# Altium PCB LEDMATRIX.PcbDoc
Units mm, origin at the board's own origin, x right, y up, seen from the top; angles counter-clockwise.
Board outline 143.26 x 36.32 mm, 2 copper layers (Top Layer, Bottom Layer); 27 components, 78 nets, 240 pads, 74 vias.
Unrouted connection lines stored in the file: 3.
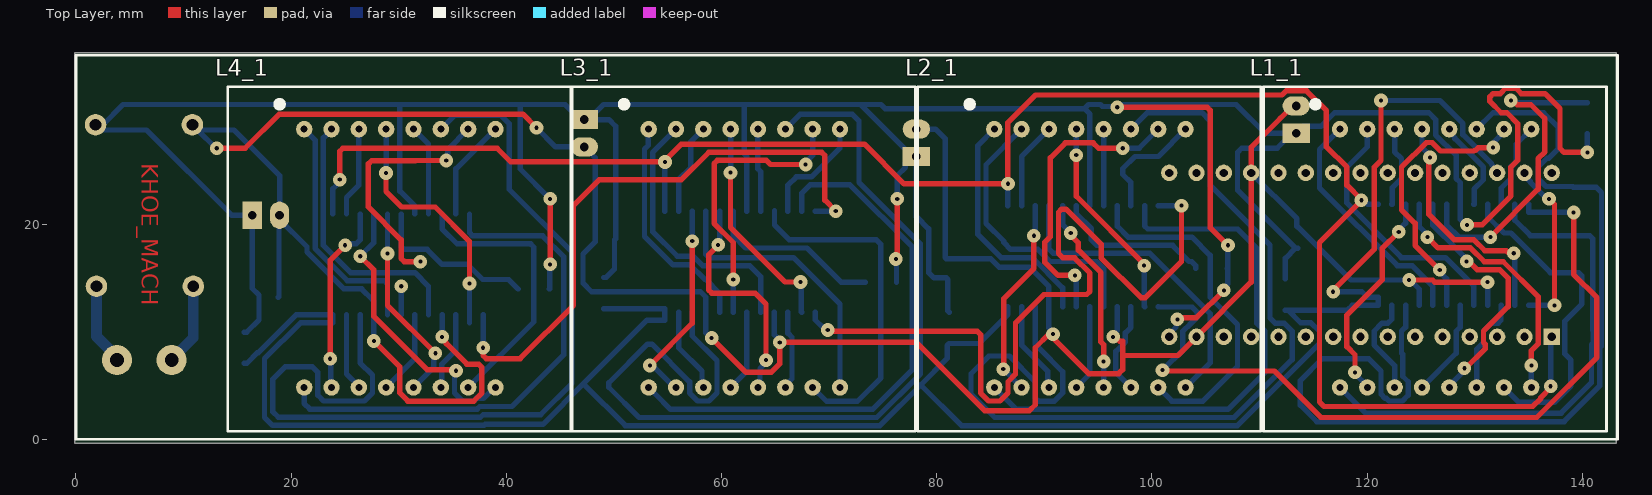
[diagram p0: Top Layer view]
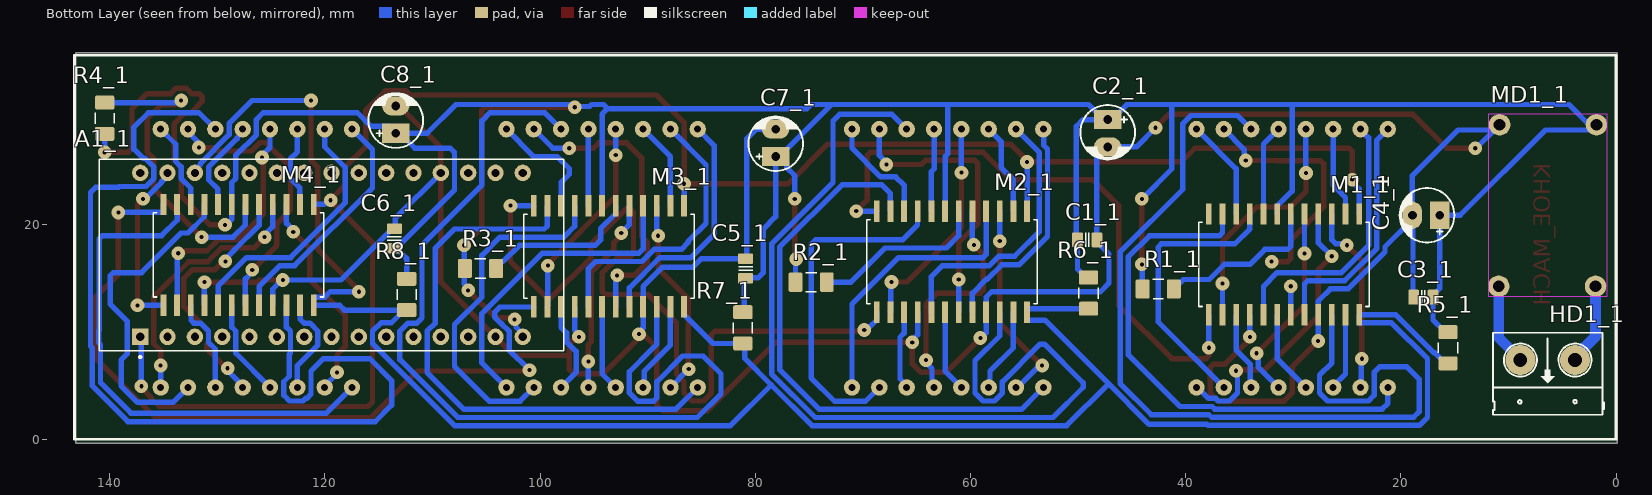
[diagram p1: Bottom Layer view, seen from below]

## Layer stack, top to bottom
Top Solder: solder mask 0.0102, Solder Resist, Dk 3.5
Top Layer: signal copper 0.0356
Dielectric 1: dielectric 0.32, FR-4, Dk 4.8
Bottom Layer: signal copper 0.0356
Bottom Solder: solder mask 0.0102, Solder Resist, Dk 3.5

## Board outline
-0.127,-0.381 143.129,-0.381 143.129,35.941 -0.127,35.941

## Design rules (kind name [scope] priority, off if disabled: settings)
Clearance [All] p1: gap=0.254 ignorepadtopadclearanceinfootprint=FALSE except(0.508: Arc-Fill Arc-Poly Arc-Region Track-Fill Track-Poly Track-Region SMDPad-Fill SMDPad-Poly SMDPad-Region THPad-Fill THPad-Poly THPad-Region Via-Fill Via-Poly Via-Region Fill-Fill Fill-Poly Fill-Region Poly-Poly Poly-Region Region-Region)
HoleSize [All] p1: absolutevalues=TRUE maxlimit=3 minlimit=0.15 maxpercent=80.000 minpercent=20.000
PolygonConnect [All] p1: connectstyle=Relief reliefconductorwidth=0.254 reliefentries=4 polygonreliefangle="90 Angle" airgapwidth=0.254
RoutingVias [All] p1: holewidth=0 width=1.27 viastyle="Through Hole" minholewidth=0 minwidth=1.27 maxholewidth=0 maxwidth=1.27
SolderMaskExpansion [All] p1: expansion=0.102 istentingtop=FALSE
Width [All] p1: maxlimit=1 minlimit=0.254 preferedwidth=0.5
29 further rules are at their usual default settings.

## Components (designator, comment, footprint, x,y, rotation, side; value= is the part's Value field where it differs from the comment)
A1_1 "ARDUINO-NANO" ARDUINO-NANO 119.634,16.764 r180 bottom (schematic designator A1)
C1_1 "approved sub OK" CAPC2012X135N 49.149,18.542 r180 bottom value=0.1uF (schematic designator C1)
C2_1 "10uF" CP1/2 47.244,29.718 r270 bottom (schematic designator C2)
C3_1 "approved sub OK" CAPC2012X135N 17.907,13.208 r0 bottom value=0.1uF (schematic designator C3)
C4_1 "10uF" CP1/2 16.383,20.828 r0 bottom (schematic designator C4)
C5_1 "approved sub OK" CAPC2012X135N 80.899,15.875 r90 bottom value=0.1uF (schematic designator C5)
C6_1 "approved sub OK" CAPC2012X135N 113.538,18.669 r90 bottom value=0.1uF (schematic designator C6)
C7_1 "10uF" CP1/2 78.105,26.289 r90 bottom (schematic designator C7)
C8_1 "10uF" CP1/2 113.411,28.448 r90 bottom (schematic designator C8)
HD1_1 "Header 2" HED2 3.81,7.366 r0 bottom (schematic designator HD1)
L1_1 "LEDMATRIX-8X8" LEDMATRIX_8X8 125.857,17.018 r0 top (schematic designator L1)
L2_1 "LEDMATRIX-8X8" LEDMATRIX_8X8 93.726,17.018 r0 top (schematic designator L2)
L3_1 "LEDMATRIX-8X8" LEDMATRIX_8X8 61.608,17.018 r0 top (schematic designator L3)
L4_1 "LEDMATRIX-8X8" LEDMATRIX_8X8 29.591,17.018 r0 top (schematic designator L4)
M1_1 "MAX7219" MAX7219 30.861,16.383 r90 bottom (schematic designator M1)
M2_1 "MAX7219" MAX7219 61.722,16.637 r90 bottom (schematic designator M2)
M3_1 "MAX7219" MAX7219 93.599,17.145 r90 bottom (schematic designator M3)
M4_1 "MAX7219" MAX7219 128.016,17.272 r90 bottom (schematic designator M4)
MD1_1 "module- mini360" MODULE-MINI360 6.35,21.717 r90 bottom (schematic designator MD1)
R1_1 "Thick Film" RESC3216N_ZERO 42.545,13.97 r0 bottom value=27K (schematic designator R1)
R2_1 "Thick Film" RESC3216N_ZERO 74.803,14.605 r0 bottom value=27K (schematic designator R2)
R3_1 "Thick Film" RESC3216N_ZERO 105.537,15.875 r0 bottom value=27K (schematic designator R3)
R4_1 "Thick Film" RESC3216N_ZERO 140.462,29.845 r270 bottom value=27K (schematic designator R4)
R5_1 "Thick Film" RESC3216N_ZERO 15.621,8.509 r90 bottom value=10K (schematic designator R5)
R6_1 "Thick Film" RESC3216N_ZERO 49.022,13.589 r90 bottom value=10K (schematic designator R6)
R7_1 "Thick Film" RESC3216N_ZERO 81.153,10.361 r90 bottom value=10K (schematic designator R7)
R8_1 "Thick Film" RESC3216N_ZERO 112.395,13.462 r90 bottom value=10K (schematic designator R8)

## Footprints (in the part's own frame and the unit in brackets; to place one, negate y for a bottom-side part, rotate by r counter-clockwise, add the part's x,y. Pads: shape width x height; smd on the part's side, far side on the other; paste and mask are expansions set on the pad)
ARDUINO-NANO [mil]
  rect 60x60 / inner round 60 / far side rect 60x60 hole 30: 1(-690,-285)
  round 60 hole 30: 2(-590,-285) 3(-490,-285) 4(-390,-285) 5(-290,-285) 6(-190,-285) 7(-90,-285) 8(10,-285) 9(110,-285) 10(210,-285) 11(310,-285) 12(410,-285) 13(510,-285) 14(610,-285) 15(710,-285) 16(710,315) 17(610,315) 18(510,315) 19(410,315) 20(310,315) 21(210,315) 22(110,315) 23(10,315) 24(-90,315) 25(-190,315) 26(-290,315) 27(-390,315) 28(-490,315) 29(-590,315) 30(-690,315)
  silkscreen extent -840,-363 860,365, body extent -885,-335 860,365, height 236
CAPC2012X135N [mm] "Chip Capacitor, Body 2.0x1.2mm, EIA 0805, IPC Medium Density"
  round 0.254 on Mech15: 0(0,0)
  rrect25% 1x1.4 smd: 1(-0.9,0) 2(0.9,0)
  Top Layer pour cut-out: -0.675,0.7 -0.475,0.9 0.475,0.9 0.675,0.7 0.675,-0.7 0.475,-0.9 -0.475,-0.9 -0.675,-0.7
  silkscreen extent -0.15,-0.65 0.15,0.65, body extent -1.1,-0.72 1.1,0.73, height 1.34
CP1/2 [mil]
  rect 70x100 hole 32: 1(0,0)
  oval 70x100 hole 32: 2(100,0)
  silkscreen extent -53,-100 146,100, body extent -54,-99 144,100, height 296
HED2 [mil] "Header 2, 2 pin, hight 300mil, Pin to Pin 200, Colour Green"
  round 110 hole 50: 1(0,0) 2(200,0)
  silkscreen extent -106,-100 300,200, body extent -92,-90 302,205, height 394
LEDMATRIX_8X8 [mil] "3mm"
  round 60 hole 25.59: C1(-30,464.88) C2(-130,-480) C3(-30,-480) C4(270,464.88) C5(170,-480) C6(170,464.88) C7(-230,464.88) C8(-330,464.88) R1(370,464.88) R2(-130,464.88) R3(370,-480) R4(70,464.88) R5(-330,-480) R6(270,-480) R7(-230,-480) R8(70,-480)
  silkscreen extent -610,-640 645,620, body extent -610,-639 650,621, height 239
MAX7219 [mil]
  rect 78x21 smd: 1(-189.5,275) 2(-189.5,225) 3(-189.5,175) 4(-189.5,125) 5(-189.5,75) 6(-189.5,25) 7(-189.5,-25) 8(-189.5,-75) 9(-189.5,-125) 10(-189.5,-175) 11(-189.5,-225) 12(-189.5,-275) 13(179.5,-275) 14(179.5,-225) 15(179.5,-175) 16(179.5,-125) 17(179.5,-75) 18(179.5,-25) 19(179.5,25) 20(179.5,75) 21(179.5,125) 22(179.5,175) 23(179.5,225) 24(179.5,275)
  silkscreen extent -159,-312 149,312, body extent -208,-303 198,303, height 104
MODULE-MINI360 [mm]
  round 2 hole 1.1 mask+0: 1(7.52,4.466) 2(7.52,-4.534) 3(-7.493,4.555) 4(-7.493,-4.445)
  Top Layer keep-out region: -8.47,5.497 8.53,5.497 8.53,-5.503 -8.47,-5.503
RESC3216N_ZERO [mm] "Chip Resistor, Body 3.2x1.6mm, 1206, IPC Medium Density"
  round 0.508 on Mech15: 0(0,0)
  rrect25% 1.3x1.8 smd: 1(-1.45,0) 2(1.45,0)
  silkscreen extent -0.51,-0.89 0.51,0.89, body extent -1.62,-0.82 1.63,0.83, height 0.69

## Part data
C1_1 C3_1 C5_1 C6_1: library part "CAP C_0805", "Capacitor SMD Cer 1.8nF 10% 50V X7R 0805", Manufacturer 1="AVX Corporation", Manufacturer Part Number 1=08055C182KAT2A, Operating Temperature="-55°C ~ 125°C", Package / Case="0805 (2012 metric)", Ratings="50V; X7R", Supplier Part Number 1=478-1374-1-ND, Tolerance=±10%, SCDType=source*, Supplier 1=Digi-Key
C2_1 C4_1 C7_1 C8_1: library part "CAP hoa", "Cap"
HD1_1: "Header 2 (Green)"
R1_1 R2_1 R3_1 R4_1 R5_1 R6_1 R7_1 R8_1: library part RES_1206, "Resistor SMD chip 0.0 Ohm 0.25W 1206", Manufacturer 1=Vishay/Dale, Manufacturer Part Number 1=CRCW12060000Z0EA, Package / Case="1206 (3216 metric)", Ratings=1/4W, Supplier Part Number 1=541-0.0ECT-ND, Tolerance=±5%, SCDType=spec*\?, Supplier 1=Digi-Key

## Via types
v1: diameter 1.27, hole 0.381, Top Layer to Bottom Layer, 74 vias

## Nets (pads, with @x,y where several pads share a name; then routed paths per layer and width w, separated by ;. In a path a pad name is that pad's centre, name@x,y a point inside that pad or via, vN(x,y) a via of type N, cw(c..) or ccw(c..) an arc to the next point about the centre after c; other vN are vias at no path point)
5V: 
A1: 
A2: 
A3: 
A4: 
B1: 
B2: 
B3: 
B4: 
C1: 
C2: 
C3: 
C4: 
CLK: 
D1: 
D2: 
D3: 
D4: 
DIG01: 
DIG02: 
DIG03: 
DIG04: 
DIG11: 
DIG12: 
DIG13: 
DIG14: 
DIG21: 
DIG22: 
DIG23: 
DIG24: 
DIG31: 
DIG32: 
DIG33: 
DIG34: 
DIG41: 
DIG42: 
DIG43: 
DIG44: 
DIG51: 
DIG52: 
DIG53: 
DIG54: 
DIG61: 
DIG62: 
DIG63: 
DIG64: 
DIG71: 
DIG72: 
DIG73: 
DIG74: 
DIN1: 
DIN2: 
DIN3: 
DIN4: 
DP1: 
DP2: 
DP3: 
DP4: 
E1: 
E2: 
E3: 
E4: 
F1: 
F2: 
F3: 
F4: 
G1: 
G2: 
G3: 
G4: 
GND: 
LOAD: 
NetHD1_1: 
NetHD1_2: 
NetM1_18: 
NetM2_18: 
NetM3_18: 
NetM4_18: 
pads on no net: A1_1.1 A1_1.2 A1_1.3 A1_1.4 A1_1.5 A1_1.6 A1_1.7 A1_1.8 A1_1.9 A1_1.10 A1_1.11 A1_1.12 A1_1.13 A1_1.14 A1_1.15 A1_1.16 A1_1.17 A1_1.18 A1_1.19 A1_1.20 A1_1.21 A1_1.22 A1_1.23 A1_1.24 A1_1.25 A1_1.26 A1_1.27 A1_1.28 A1_1.29 A1_1.30 C1_1.0 C1_1.1 C1_1.2 C2_1.1 C2_1.2 C3_1.0 C3_1.1 C3_1.2 C4_1.1 C4_1.2 C5_1.0 C5_1.1 C5_1.2 C6_1.0 C6_1.1 C6_1.2 C7_1.1 C7_1.2 C8_1.1 C8_1.2 HD1_1.1 HD1_1.2 L1_1.C1 L1_1.C2 L1_1.C3 L1_1.C4 L1_1.C5 L1_1.C6 L1_1.C7 L1_1.C8 L1_1.R1 L1_1.R2 L1_1.R3 L1_1.R4 L1_1.R5 L1_1.R6 L1_1.R7 L1_1.R8 L2_1.C1 L2_1.C2 L2_1.C3 L2_1.C4 L2_1.C5 L2_1.C6 L2_1.C7 L2_1.C8 L2_1.R1 L2_1.R2 L2_1.R3 L2_1.R4 L2_1.R5 L2_1.R6 L2_1.R7 L2_1.R8 L3_1.C1 L3_1.C2 L3_1.C3 L3_1.C4 L3_1.C5 L3_1.C6 L3_1.C7 L3_1.C8 L3_1.R1 L3_1.R2 L3_1.R3 L3_1.R4 L3_1.R5 L3_1.R6 L3_1.R7 L3_1.R8 L4_1.C1 L4_1.C2 L4_1.C3 L4_1.C4 L4_1.C5 L4_1.C6 L4_1.C7 L4_1.C8 L4_1.R1 L4_1.R2 L4_1.R3 L4_1.R4 L4_1.R5 L4_1.R6 L4_1.R7 L4_1.R8 M1_1.1 M1_1.2 M1_1.3 M1_1.4 M1_1.5 M1_1.6 M1_1.7 M1_1.8 M1_1.9 M1_1.10 M1_1.11 M1_1.12 M1_1.13 M1_1.14 M1_1.15 M1_1.16 M1_1.17 M1_1.18 M1_1.19 M1_1.20 M1_1.21 M1_1.22 M1_1.23 M1_1.24 M2_1.1 M2_1.2 M2_1.3 M2_1.4 M2_1.5 M2_1.6 M2_1.7 M2_1.8 M2_1.9 M2_1.10 M2_1.11 M2_1.12 M2_1.13 M2_1.14 M2_1.15 M2_1.16 M2_1.17 M2_1.18 M2_1.19 M2_1.20 M2_1.21 M2_1.22 M2_1.23 M2_1.24 M3_1.1 M3_1.2 M3_1.3 M3_1.4 M3_1.5 M3_1.6 M3_1.7 M3_1.8 M3_1.9 M3_1.10 M3_1.11 M3_1.12 M3_1.13 M3_1.14 M3_1.15 M3_1.16 M3_1.17 M3_1.18 M3_1.19 M3_1.20 M3_1.21 M3_1.22 M3_1.23 M3_1.24 M4_1.1 M4_1.2 M4_1.3 M4_1.4 M4_1.5 M4_1.6 M4_1.7 M4_1.8 M4_1.9 M4_1.10 M4_1.11 M4_1.12 M4_1.13 M4_1.14 M4_1.15 M4_1.16 M4_1.17 M4_1.18 M4_1.19 M4_1.20 M4_1.21 M4_1.22 M4_1.23 M4_1.24 MD1_1.1 MD1_1.2 MD1_1.3 MD1_1.4 R1_1.0 R1_1.1 R1_1.2 R2_1.0 R2_1.1 R2_1.2 R3_1.0 R3_1.1 R3_1.2 R4_1.0 R4_1.1 R4_1.2 R5_1.0 R5_1.1 R5_1.2 R6_1.0 R6_1.1 R6_1.2 R7_1.0 R7_1.1 R7_1.2 R8_1.0 R8_1.1 R8_1.2
copper on no net: | length 2876.9
  Top Layer w0.254: 10.816,28.935 10.816,29.237
  Top Layer w0.5: v1(13.081,27.051) 15.725,27.051 18.9,30.226 41.529,30.226 v1(42.799,28.956) ; v1(23.622,7.493) 23.622,16.637 v1(25.019,18.034) ; v1(24.511,24.13) 24.511,26.758 24.804,27.051 39.135,27.051 40.405,25.781 v1(54.737,25.781) 54.737,25.908 56.261,27.432 73.279,27.432 76.962,23.749 v1(86.614,23.749) 86.614,29.425 89.193,32.004 112.076,32.004 112.453,32.381 114.369,32.381 116.209,30.541 116.209,27.186 118.106,25.289 118.106,23.626 119.465,22.267 v1(119.465,22.219) 119.465,22.183 115.574,18.292 115.574,3.464 115.99,3.048 135.382,3.048 136.144,3.81 136.144,3.883 137.053,4.793 v1(137.053,4.933) ; v1(26.417,17.015) 27.686,15.747 27.686,11.43 32.639,6.477 35.219,6.477 v1(35.326,6.37) ; v1(27.686,9.144) 30.095,6.735 30.095,4.31 30.849,3.556 36.969,3.556 37.719,4.306 37.719,6.692 37.426,6.985 36.322,6.985 34.417,8.89 34.417,8.936 34.036,9.317 v1(34.036,9.525) ; v1(28.816,24.752) 28.816,23.042 30.267,21.59 ; v1(28.956,17.272) 28.956,12.446 v1(33.401,8.001) ; v1(30.226,14.224) v1@30.267,14.265 ; 30.278,21.59 33.389,21.59 36.576,18.403 v1(36.576,14.478) ; v1(32.005,16.513) 32.003,16.51 30.519,16.51 30.226,16.803 30.226,18.542 27.178,21.59 27.178,25.598 27.471,25.891 31.52,25.891 31.541,25.912 v1(34.417,25.912) ; v1(37.846,8.509) 37.846,7.786 38.139,7.493 41.275,7.493 46.228,12.446 46.228,21.717 48.641,24.13 56.261,24.13 58.809,26.678 69.303,26.678 69.596,26.385 69.596,22.225 v1(70.612,21.209) ; v1(44.069,16.256) v1(44.069,22.352) ; v1(53.34,6.858) 57.277,10.795 v1(57.277,18.415) ; v1(59.08,9.423) 62.279,6.223 64.607,6.223 65.405,7.021 v1(65.405,9.017) 78.105,9.017 84.455,2.667 88.607,2.667 89.154,3.214 89.154,8.509 90.424,9.779 v1@90.613,9.59 ; v1(59.686,18.078) 59.686,18.03 58.801,17.145 58.801,13.882 59.094,13.589 63.119,13.589 64.135,12.573 v1(64.135,7.362) ; v1(60.833,24.785) 60.833,19.685 65.893,14.625 v1(67.33,14.625) ; v1(61.087,14.859) 61.087,18.288 59.309,20.066 59.309,25.631 59.602,25.924 64.167,25.924 64.552,25.539 v1(67.818,25.539) ; v1(69.867,10.156) 69.99,10.033 83.785,10.033 84.078,9.74 84.078,4.302 84.82,3.56 85.868,3.56 86.618,4.31 86.618,5.35 87.322,6.055 87.322,10.83 89.955,13.462 93.941,13.462 94.234,13.755 94.234,15.444 92.815,16.863 91.714,16.863 91.309,17.268 91.309,21.102 91.602,21.395 92.016,21.395 95.273,18.138 95.273,16.868 98.98,13.161 99.394,13.161 102.743,16.51 v1(102.743,21.717) ; v1(76.2,16.764) 76.327,16.891 v1(76.327,22.352) ; v1(86.183,6.527) 86.233,6.576 86.233,13.081 89.027,15.875 v1(89.027,18.923) ; v1(90.801,9.779) v1@90.612,9.59 ; v1(92.448,19.181) 92.448,18.973 93.162,18.259 93.162,17.582 95.254,15.49 95.254,9.053 95.504,8.803 v1(95.504,7.239) ; v1(92.829,15.238) 91.264,15.238 90.051,16.452 90.051,18.336 90.555,18.84 90.555,26.166 91.944,27.555 94.531,27.555 95.035,27.051 v1(97.282,27.051) ; v1(92.964,26.416) 92.964,22.606 99.271,16.299 v1(99.271,16.141) ; v1(96.393,9.525) 96.601,9.525 97.021,9.105 97.282,9.105 97.282,7.791 ; v1(96.774,30.865) 105.121,30.865 105.414,30.572 105.414,19.681 v1(107.061,18.034) ; v1(100.984,6.428) 101.062,6.35 111.379,6.35 115.697,2.032 135.763,2.032 141.351,7.62 141.351,13.167 139.192,15.326 v1(139.192,21.082) ; v1(102.362,11.155) 102.509,11.302 v1@102.742,11.302 ; v1@102.743,11.303 104.14,11.303 v1(106.68,13.843) ; 113.411,30.988 113.096,30.988 111.949,29.841 111.932,29.841 109.22,27.129 109.22,14.605 104.14,9.525 102.406,7.791 97.282,7.791 ; v1(116.836,13.716) 116.836,13.839 120.646,17.649 120.646,25.281 121.285,25.92 v1(121.285,31.492) ; v1(118.872,6.223) 118.872,7.861 118.114,8.619 118.114,11.539 121.4,14.825 121.4,17.745 v1(122.936,19.281) ; v1(123.896,14.803) 126.084,14.803 126.282,14.605 v1(131.191,14.605) ; v1(125.599,18.794) 126.605,17.788 129.609,17.788 130.895,16.502 132.646,16.502 135.886,13.262 135.886,8.873 135.256,8.243 v1(135.255,6.858) ; v1(125.833,26.186) 125.734,26.088 125.734,20.911 128.103,18.542 129.921,18.542 130.937,17.526 132.946,17.526 133.033,17.439 133.477,17.439 v1(133.624,17.292) ; v1(126.746,15.752) 126.742,15.752 124.46,18.034 124.46,20.066 123.194,21.332 123.194,25.289 125.495,27.59 126.04,27.59 126.833,26.797 129.903,26.797 129.945,26.839 130.068,26.839 130.318,27.089 131.674,27.089 v1(131.703,27.118) ; v1(129.036,6.604) 129.159,6.604 130.978,8.423 130.978,8.837 130.814,9.001 130.814,10.049 133.096,12.331 133.096,14.986 132.334,15.748 130.246,15.748 129.457,16.538 v1(129.248,16.538) ; v1(129.286,19.935) 130.679,19.935 133.354,22.61 133.354,25.289 133.981,25.916 133.981,29.35 132.978,30.353 132.461,30.353 131.398,31.416 131.398,31.83 131.699,32.131 132.378,32.131 132.878,32.631 133.822,32.631 134.322,32.131 136.525,32.131 137.922,30.734 137.922,27.051 138.303,26.67 v1(140.462,26.67) ; v1(131.445,18.796) 135.894,23.245 135.894,26.088 136.521,26.715 136.521,29.799 136.228,30.092 135.225,31.095 133.955,31.095 133.558,31.492 v1(133.35,31.492) ; v1(136.906,22.352) 137.414,21.844 v1(137.414,12.446) ; v1@90.613,9.59 94.103,6.1 96.905,6.1 97.282,6.477 97.282,7.791
  Bottom Layer w0.5: 10.816,29.237 11.306,28.748 ; v1(13.081,27.051) 13.003,27.051 11.306,28.748 ; 15.621,7.059 15.871,7.059 16.863,8.051 16.947,8.051 20.466,11.57 23.876,11.57 23.876,10.846 23.859,10.829 20.862,10.829 17.526,7.493 17.526,2.032 18.26,1.298 37.91,1.298 38.009,1.397 43.384,1.397 47.219,5.232 ; 15.621,9.959 15.871,9.959 17.007,11.095 17.007,13.208 17.007,13.408 16.383,14.032 16.383,20.828 14.478,20.828 6.558,28.748 2.306,28.748 1.816,29.237 2.509,29.237 4.387,31.115 30.099,31.115 ; 18.807,13.208 18.865,13.266 18.865,20.77 18.923,20.828 18.923,24.511 14.686,28.748 11.306,28.748 ; 18.923,20.447 21.471,17.899 21.471,17.417 24.902,13.986 26.543,13.986 27.559,12.97 27.559,12.954 27.669,12.844 27.669,11.586 27.686,11.57 v1(27.686,9.144) ; 21.209,4.826 21.209,3.341 21.744,2.806 37.286,2.806 37.528,3.048 40.513,3.048 45.339,7.874 45.339,16.953 43.377,18.915 36.869,18.915 36.576,19.208 36.576,20.942 ; 21.209,28.826 22.225,27.81 22.225,17.73 25.215,14.74 28.663,14.74 28.956,14.447 28.956,11.57 ; 23.553,5.022 23.749,4.826 23.685,4.889 23.685,7.429 v1(23.622,7.493) ; 23.749,28.826 23.749,28.783 22.987,28.021 22.987,18.034 25.527,15.494 31.496,15.494 32.766,14.224 32.766,11.57 ; 23.876,20.942 23.876,23.287 24.511,23.922 v1(24.511,24.13) ; v1(25.019,18.034) 25.166,18.181 26.055,18.181 26.416,18.542 26.416,20.942 ; 25.146,11.57 25.146,6.075 26.289,4.932 26.289,4.826 ; 25.146,20.942 25.146,22.479 26.289,23.622 26.289,28.826 ; 26.416,11.57 26.416,7.104 27.555,5.965 27.555,4.302 26.813,3.56 23.014,3.56 22.479,4.095 22.479,6.223 21.963,6.739 19.439,6.739 18.28,5.58 18.28,2.579 18.807,2.052 37.598,2.052 37.832,2.286 43.18,2.286 46.093,5.199 46.093,17.407 40.259,23.241 40.259,29.337 40.255,29.341 40.255,29.35 39.513,30.092 35.175,30.092 33.909,28.826 ; v1(26.417,17.015) 27.686,18.284 27.686,20.942 ; v1(28.816,24.752) 28.829,24.765 28.829,26.387 28.829,28.826 ; 28.829,4.826 31.496,7.493 31.496,11.57 ; v1(28.956,17.272) 28.956,20.942 ; 30.226,11.57 v1(30.226,14.224) ; 30.226,20.942 30.226,17.946 30.519,17.653 32.639,17.653 34.036,16.256 36.409,16.256 37.806,14.859 40.206,14.859 41.095,13.97 ; 31.369,4.826 33.254,6.711 33.254,7.854 v1(33.401,8.001) ; 31.369,28.826 32.766,27.429 32.766,20.942 ; 31.496,20.942 31.496,21.666 30.099,23.063 30.099,31.115 ; 33.909,4.826 34.008,4.925 34.008,6.997 35.306,8.295 35.306,11.57 ; v1(34.036,9.525) 34.036,11.57 ; 34.036,20.942 34.036,19.558 35.433,18.161 42.252,18.161 42.545,17.868 42.545,10.922 36.449,4.826 ; v1(34.417,25.912) 34.564,26.059 34.564,26.941 36.449,28.826 ; 35.306,20.942 35.306,25.143 38.989,28.826 ; v1(35.326,6.37) 35.179,6.223 35.179,4.306 35.925,3.56 36.973,3.56 37.215,3.802 37.875,3.802 38.899,4.826 38.989,4.826 ; 36.576,10.846 36.576,11.57 v1(36.576,14.478) ; v1(37.846,8.509) 37.846,11.57 ; v1(42.799,28.956) 44.577,27.178 47.244,27.178 47.279,27.178 47.87,26.588 47.87,26.552 48.26,26.162 48.26,18.553 48.249,18.542 48.249,18.342 47.117,17.21 47.117,14.517 47.918,13.716 58.039,13.716 58.53,13.225 58.53,11.84 58.547,11.824 58.547,9.906 59.03,9.423 v1(59.08,9.423) ; 43.995,13.97 44.032,14.007 44.032,16.219 v1(44.069,16.256) ; v1(44.069,22.352) 41.275,25.146 41.275,31.115 ; 49.022,12.139 54.72,12.139 54.737,12.122 54.737,11.1 54.72,11.083 53.07,11.083 47.219,5.232 ; 49.022,15.039 49.272,15.039 50.049,15.816 50.049,18.542 50.165,18.658 50.165,29.083 49.53,29.718 47.625,29.718 ; 53.226,4.826 53.861,4.191 55.266,2.786 74.033,2.786 77.724,6.477 77.724,17.857 71.935,23.646 68.223,23.646 67.437,22.86 67.437,21.196 ; 53.226,28.826 53.187,28.788 53.187,27.314 52.84,26.967 52.84,18.865 55.49,16.214 57.091,16.214 58.416,14.889 58.492,14.889 59.817,13.564 59.817,11.824 ; v1(53.34,6.858) 53.487,6.711 53.741,6.711 55.626,4.826 55.766,4.826 ; 54.737,21.196 v1(54.737,25.781) ; 55.766,28.826 53.594,26.654 53.594,19.304 55.88,17.018 57.354,17.018 58.235,16.137 62.603,16.137 63.627,15.113 63.627,11.824 ; 56.007,11.824 56.007,8.509 58.178,6.338 58.178,4.954 58.306,4.826 ; 56.007,21.196 56.007,24.13 57.15,25.273 57.15,27.67 58.306,28.826 ; 57.277,11.824 57.277,9.614 59.572,7.32 59.572,4.302 58.83,3.56 57.781,3.56 57.04,4.302 57.04,5.342 53.528,8.854 53.114,8.854 49.515,5.255 49.515,4.841 52.324,2.032 74.422,2.032 78.478,6.088 78.478,18.169 72.771,23.876 72.771,29.591 72.136,30.226 67.326,30.226 65.926,28.826 ; v1(57.277,18.415) 57.277,21.196 ; 58.547,21.196 58.547,17.184 58.84,16.891 66.675,16.891 71.006,12.56 71.006,4.826 ; v1(59.686,18.078) 59.817,18.209 59.817,21.196 ; v1(60.833,24.785) 60.839,24.791 60.839,28.82 60.846,28.826 ; 60.846,4.826 62.357,6.337 62.357,11.824 ; 61.087,11.824 v1(61.087,14.859) ; 61.087,21.196 61.087,18.923 62.23,17.78 67.945,17.78 71.12,14.605 73.353,14.605 ; 62.357,21.196 62.357,26.289 62.103,26.543 62.103,28.293 62.112,28.302 62.112,29.35 62.103,29.359 62.103,31.115 ; 63.386,4.826 63.569,5.01 63.569,6.588 64.135,7.154 v1(64.135,7.362) ; 63.386,28.826 63.373,28.813 63.373,25.146 63.627,24.892 63.627,21.196 ; 64.897,11.824 64.897,9.733 65.405,9.225 v1(65.405,9.017) ; 64.921,21.241 64.921,19.915 66.302,18.534 74.391,18.534 74.803,18.122 74.803,5.715 72.628,3.54 69.752,3.54 68.466,4.826 ; 65.926,4.826 65.926,5.009 66.548,5.631 66.548,9.485 66.167,9.866 66.167,11.824 ; 66.167,21.196 66.167,23.622 66.945,24.4 68.342,24.4 71.006,27.064 71.006,28.826 ; v1(67.33,14.625) 67.42,14.535 67.42,11.84 67.437,11.824 ; v1(67.818,25.539) 67.818,25.747 68.466,26.395 68.466,28.826 ; 68.707,11.824 68.707,11.1 69.503,10.303 69.719,10.303 v1(69.867,10.156) ; 68.707,21.196 70.345,21.196 70.358,21.209 v1(70.612,21.209) ; v1(76.2,16.764) 76.2,16.256 76.253,16.203 76.253,14.605 ; v1(76.327,22.352) 76.327,24.511 77.085,25.269 77.085,25.65 77.724,26.289 ; 78.105,28.829 79.883,28.829 80.772,27.94 80.772,16.902 80.899,16.775 85.029,16.775 85.802,16.002 88.622,16.002 90.424,14.2 90.424,12.332 90.424,10.364 90.801,9.987 v1(90.801,9.779) ; 81.153,11.811 81.026,11.938 81.026,14.848 80.899,14.975 80.874,15 79.742,15 79.248,15.494 79.248,19.558 78.105,20.701 78.105,26.289 77.724,26.289 ; 85.344,4.826 87.392,2.778 107.053,2.778 110.486,6.211 110.486,10.049 109.732,10.803 109.732,17.78 107.962,19.55 99.607,19.55 99.314,19.843 99.314,21.704 ; 85.344,28.826 83.82,27.302 83.82,19.05 85.979,16.891 88.875,16.891 91.694,14.072 91.694,12.332 ; v1(86.183,6.527) 87.884,4.826 ; 86.614,12.332 86.614,11.608 83.917,8.911 81.153,8.911 80.967,8.725 80.967,7.511 78.511,5.055 ; 86.614,21.704 v1(86.614,23.749) ; 87.884,12.332 87.884,8.752 90.298,6.338 90.298,4.952 90.424,4.826 ; 87.884,21.704 87.884,26.289 90.421,28.826 90.424,28.826 ; 87.884,28.826 87.881,28.826 84.574,25.519 84.574,20.066 86.233,18.407 86.233,18.288 86.868,17.653 89.397,17.653 90.524,16.526 94.853,16.526 95.504,15.875 95.504,12.332 ; v1(89.027,18.923) 89.137,19.033 89.137,21.688 89.154,21.704 ; 89.154,12.332 89.154,8.826 89.579,8.401 91.698,6.283 91.698,4.31 90.944,3.556 89.447,3.556 89.154,3.849 89.154,5.346 86.753,7.747 84.836,7.747 83.185,6.096 83.185,4.23 85.391,2.024 107.638,2.024 113.026,7.412 113.026,10.049 112.284,10.791 111.448,10.791 110.967,11.272 110.967,18.065 105.41,23.622 105.41,29.591 104.64,30.361 99.579,30.361 98.044,28.826 ; 90.424,21.704 90.424,17.692 90.836,17.28 99.814,17.28 105.406,11.688 105.406,7.108 103.124,4.826 ; 91.694,21.704 91.694,19.964 92.448,19.21 v1(92.448,19.181) ; v1(92.829,15.238) 92.947,15.12 92.947,12.348 92.964,12.332 ; 92.964,4.826 94.234,6.096 94.234,12.332 ; 92.964,21.704 92.964,20.98 94.361,19.583 94.361,18.542 94.869,18.034 101.928,18.034 103.437,16.525 103.687,16.525 104.087,16.125 104.087,15.875 ; v1(92.964,26.416) 92.964,28.826 ; 94.234,21.704 94.234,30.226 93.726,30.734 ; 95.504,4.826 v1(95.504,7.239) ; 95.504,21.704 95.504,28.826 ; v1(96.393,9.525) 96.393,9.733 96.774,10.114 96.774,12.332 ; 96.774,21.704 96.774,19.812 97.79,18.796 103.715,18.796 105.406,17.105 105.406,13.205 107.946,10.665 107.946,6.766 104.736,3.556 101.854,3.556 100.584,4.826 ; v1(96.774,30.865) 96.702,30.937 95.389,30.937 95.211,31.115 94.107,31.115 93.726,30.734 ; v1@96.774,31.115 107.823,31.115 110.49,28.448 113.03,28.448 ; v1(97.282,27.051) 98.809,27.051 100.584,28.826 ; 98.044,4.826 96.647,6.223 96.647,8.168 97.532,9.053 97.532,9.902 98.044,10.414 98.044,12.332 ; 98.044,21.704 98.044,23.876 97.282,24.638 97.282,25.146 98.425,26.289 100.587,26.289 103.124,28.826 ; v1(99.271,16.141) 99.297,16.114 99.297,12.348 99.314,12.332 ; 100.584,12.332 100.584,12.311 100.601,12.294 103.734,12.294 104.225,11.802 104.225,11.388 103.575,10.738 103.562,10.738 102.874,10.049 102.874,9.406 102.866,9.398 102.866,8.309 v1(100.984,6.428) ; 100.584,21.704 102.222,21.704 102.235,21.717 v1(102.743,21.717) ; 101.6,9.525 101.6,9.802 102.215,10.417 ; v1(106.68,13.843) 106.68,14.051 107.061,14.432 107.061,15.801 106.987,15.875 107.061,15.949 v1(107.061,18.034) ; 109.22,24.765 113.459,20.526 113.459,19.819 113.509,19.769 113.538,19.769 118.504,14.803 v1(123.896,14.803) 124.008,14.803 124.841,13.97 124.841,12.459 ; 112.395,14.912 112.395,16.826 113.338,17.769 ; 113.538,17.769 113.338,17.769 ; v1(116.836,13.716) 119.507,13.716 120.024,13.199 121.014,13.199 121.031,13.183 121.031,12.459 118.631,12.459 118.184,12.012 112.395,12.012 112.645,12.012 113.826,10.831 114.785,10.831 115.566,10.049 115.566,8.886 107.95,1.27 82.296,1.27 78.511,5.055 ; 117.475,4.826 119.863,2.438 138.024,2.438 140.851,5.265 140.851,8.796 141.029,8.974 141.029,10.076 140.97,10.135 140.97,18.63 140.677,18.923 135.169,18.923 133.731,20.361 133.731,21.831 ; 117.475,28.826 115.574,26.925 115.574,23.364 122.801,16.137 124.173,16.137 126.111,14.199 126.111,12.459 ; v1(118.872,6.223) 118.872,6.096 120.015,4.953 120.015,4.826 ; v1(119.465,22.219) 119.673,22.219 120.061,21.831 121.031,21.831 ; 120.015,28.826 120.015,27.19 118.11,25.285 118.11,21.963 123.182,16.891 127.284,16.891 129.921,14.254 129.921,12.459 ; v1(121.285,31.492) 126.759,31.492 128.901,29.35 128.901,28.31 131.56,25.651 131.56,25.562 132.08,25.042 132.08,24.765 ; 122.301,12.459 122.284,12.442 122.284,11.155 121.92,10.791 121.396,10.791 120.65,10.045 120.65,8.763 122.555,6.858 122.555,4.826 ; 122.301,21.831 122.318,21.848 122.318,23.372 123.186,24.241 123.186,26.079 122.555,26.71 122.555,28.826 ; v1(122.936,19.281) 122.936,19.456 123.571,20.091 123.571,21.831 ; 123.571,12.459 123.571,10.426 123.194,10.049 123.194,8.013 123.309,7.898 123.309,5.862 123.821,5.35 123.821,4.103 123.278,3.56 122.031,3.56 121.781,3.81 121.666,3.81 121.281,4.195 121.281,6.354 120.142,7.493 115.824,7.493 113.792,5.461 113.792,3.175 115.316,1.651 138.303,1.651 141.605,4.953 141.605,8.483 141.783,8.662 141.783,22.936 141.283,23.436 139.149,23.436 139.09,23.495 136.64,23.495 135.894,24.241 135.894,25.289 136.737,26.132 136.902,26.132 137.744,26.975 137.744,29.007 136.398,30.353 131.702,30.353 130.175,28.826 ; 124.841,21.831 124.841,19.76 125.599,19.002 v1(125.599,18.794) ; 125.095,4.826 128.27,8.001 128.27,10.045 128.651,10.426 128.651,12.459 ; 125.095,28.826 125.095,27.132 125.833,26.395 v1(125.833,26.186) ; 126.111,21.831 126.111,19.892 128.372,17.631 128.424,17.631 128.424,17.57 129.248,16.746 v1(129.248,16.538) ; v1(126.746,15.752) 126.746,15.544 127.381,14.909 127.381,12.459 ; 127.381,21.831 127.398,21.815 127.398,19.922 128.524,18.796 v1(131.445,18.796) ; 127.635,4.826 127.635,5.015 129.036,6.416 v1(129.036,6.604) ; 127.635,28.826 127.635,28.549 128.155,28.029 128.155,27.94 130.806,25.289 130.806,24.126 129.938,23.258 129.938,21.848 129.921,21.831 ; v1(129.286,19.935) 129.163,19.935 128.651,20.447 128.651,21.831 128.651,23.864 128.266,24.249 128.266,26.405 126.369,28.302 126.369,29.714 125.73,30.353 116.967,30.353 115.701,29.087 114.05,29.087 113.411,28.448 113.03,28.448 ; 130.175,4.826 130.175,8.37 130.814,9.009 130.814,10.049 131.556,10.791 132.168,10.791 132.444,11.067 132.444,12.442 132.461,12.459 ; 131.191,12.459 v1(131.191,14.605) ; 131.191,21.831 131.208,21.815 131.208,20.684 132.715,19.177 133.35,19.177 137.033,15.494 139.661,15.494 139.954,15.201 139.954,12.573 138.371,10.99 138.371,7.925 138.938,7.358 138.938,4.953 137.414,3.429 134.112,3.429 132.715,4.826 ; v1(131.703,27.118) 131.85,27.266 131.85,27.684 132.715,28.549 132.715,28.826 ; 132.461,21.831 132.461,23.356 133.35,24.245 133.35,25.323 133.854,25.827 133.854,27.425 135.255,28.826 ; v1(133.35,31.492) 133.497,31.345 133.861,31.345 133.911,31.295 140.462,31.295 ; v1(133.624,17.292) 133.714,17.202 133.714,12.475 133.731,12.459 ; 134.62,24.765 134.62,24.488 135.14,23.968 135.14,23.928 136.716,22.352 v1(136.906,22.352) ; 135.001,12.459 136.766,12.459 136.779,12.446 v1(137.414,12.446) ; 135.001,21.831 135.001,21.107 135.018,21.091 138.929,21.091 138.938,21.082 v1(139.192,21.082) ; 135.255,4.826 v1(135.255,6.858) ; v1(137.053,4.933) 137.053,9.418 137.16,9.525 ; v1(140.462,26.67) 140.462,27.178 140.462,28.395 ; 30.099,31.115 41.275,31.115 ; 41.275,31.115 45.466,31.115 46.863,29.718 47.244,29.718 47.625,29.718 ; 47.219,5.232 47.219,5.105 51.054,1.27 74.726,1.27 78.511,5.055 ; 47.625,29.718 49.022,31.115 62.103,31.115 ; 62.103,31.115 72.898,31.115 ; 72.898,31.115 77.724,26.289 ; 72.898,31.115 74.803,31.115 75.184,30.734 93.726,30.734 ; 113.03,28.448 111.633,27.051 108.331,27.051 107.954,26.674 107.954,23.153 113.338,17.769
  Bottom Layer w1: 1.905,14.224 1.905,9.558 3.81,7.653 3.81,7.366 ; 8.89,7.366 8.89,7.433 10.905,9.448 10.905,14.224

## Other copper
Top Layer:
  text "KHOE_MACH" at 6.096,25.654 h1.52 r270

## Silkscreen, mask and mechanical layers (free items; w line width, h text height)
Top Overlay:
  lines w0.254: 0,0 0,35.687 143.256,35.687 143.256,0 0,0
Bottom Overlay:
  lines w0.254: 0,0 0,35.687 ; 0,0 143.256,0 143.256,35.687 0,35.687 ; 0,0 0,35.687